# Altium PCB MicroMultimeter__Pcb.PcbDoc
Units mil, origin at the board's own origin, x right, y up, seen from the top; angles counter-clockwise.
Board outline 1380 x 1020 mil, 2 copper layers (Top Layer, Bottom Layer); 56 components, 59 nets, 211 pads, 64 vias.
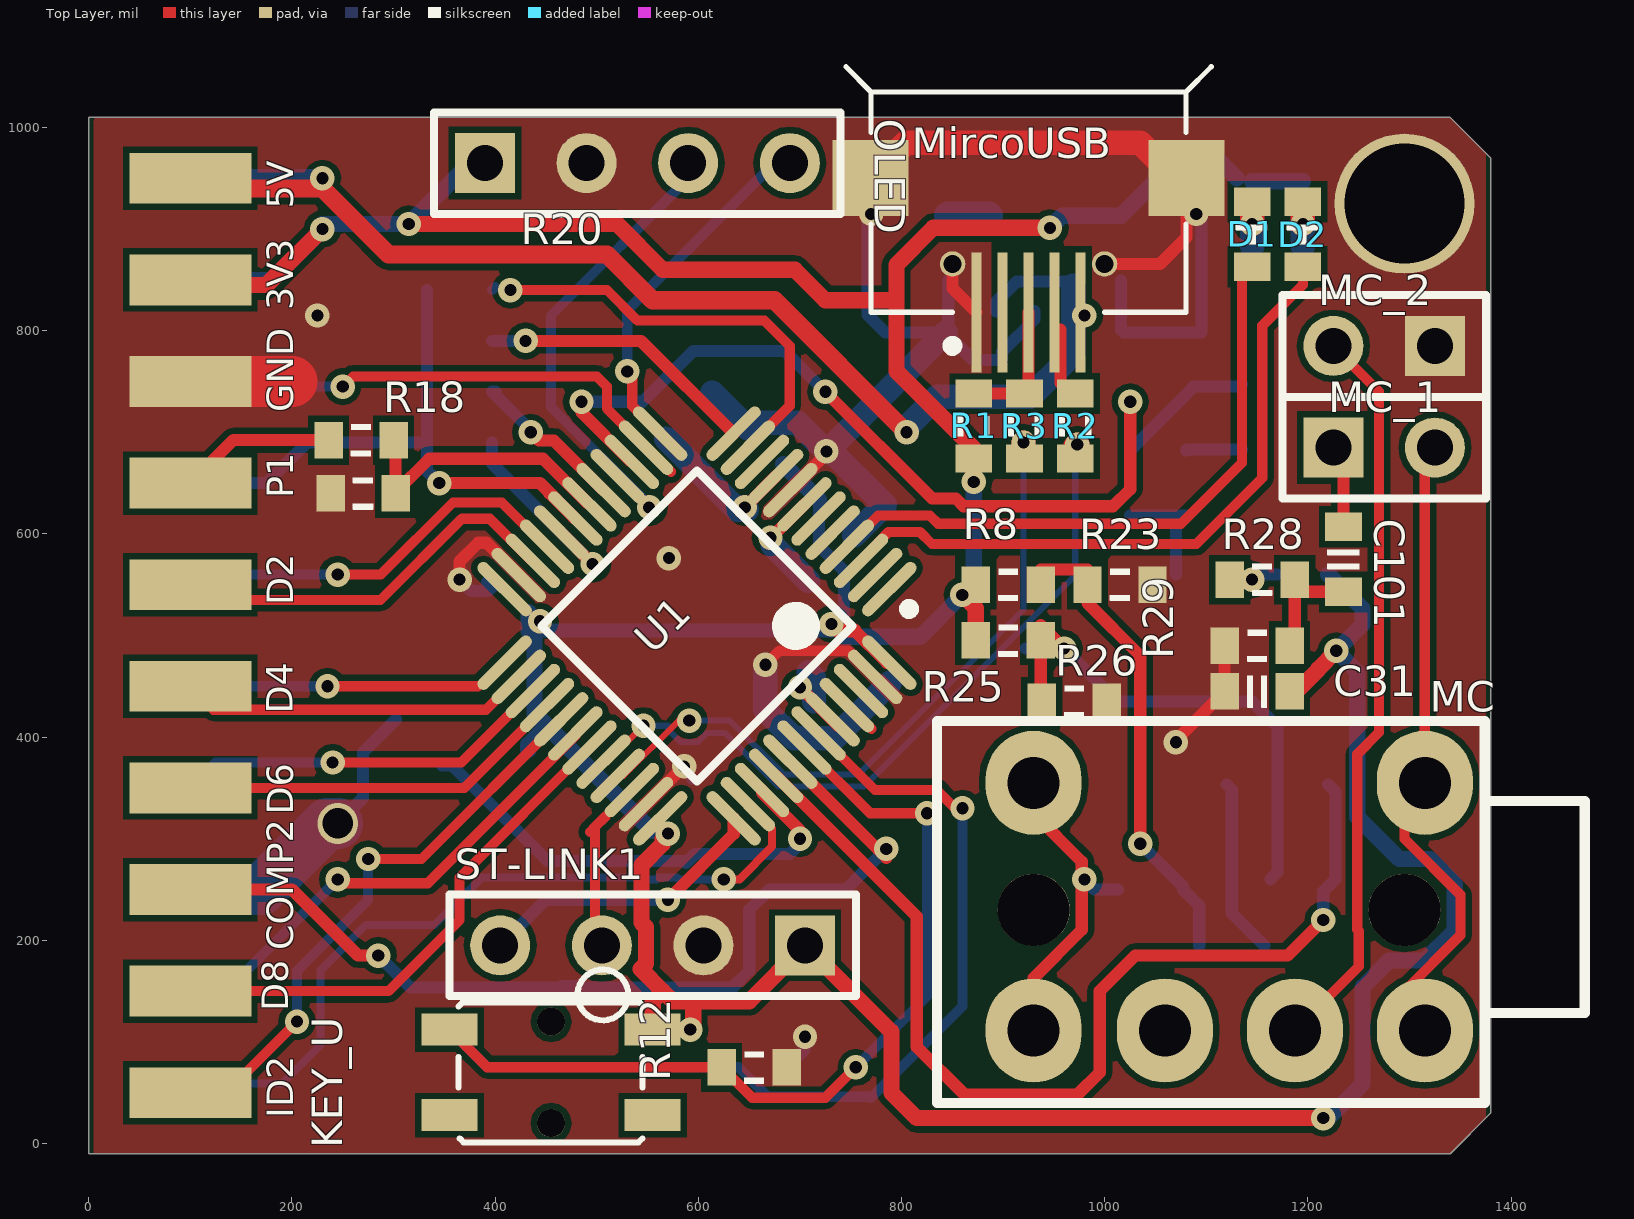
[diagram p0: Top Layer view]
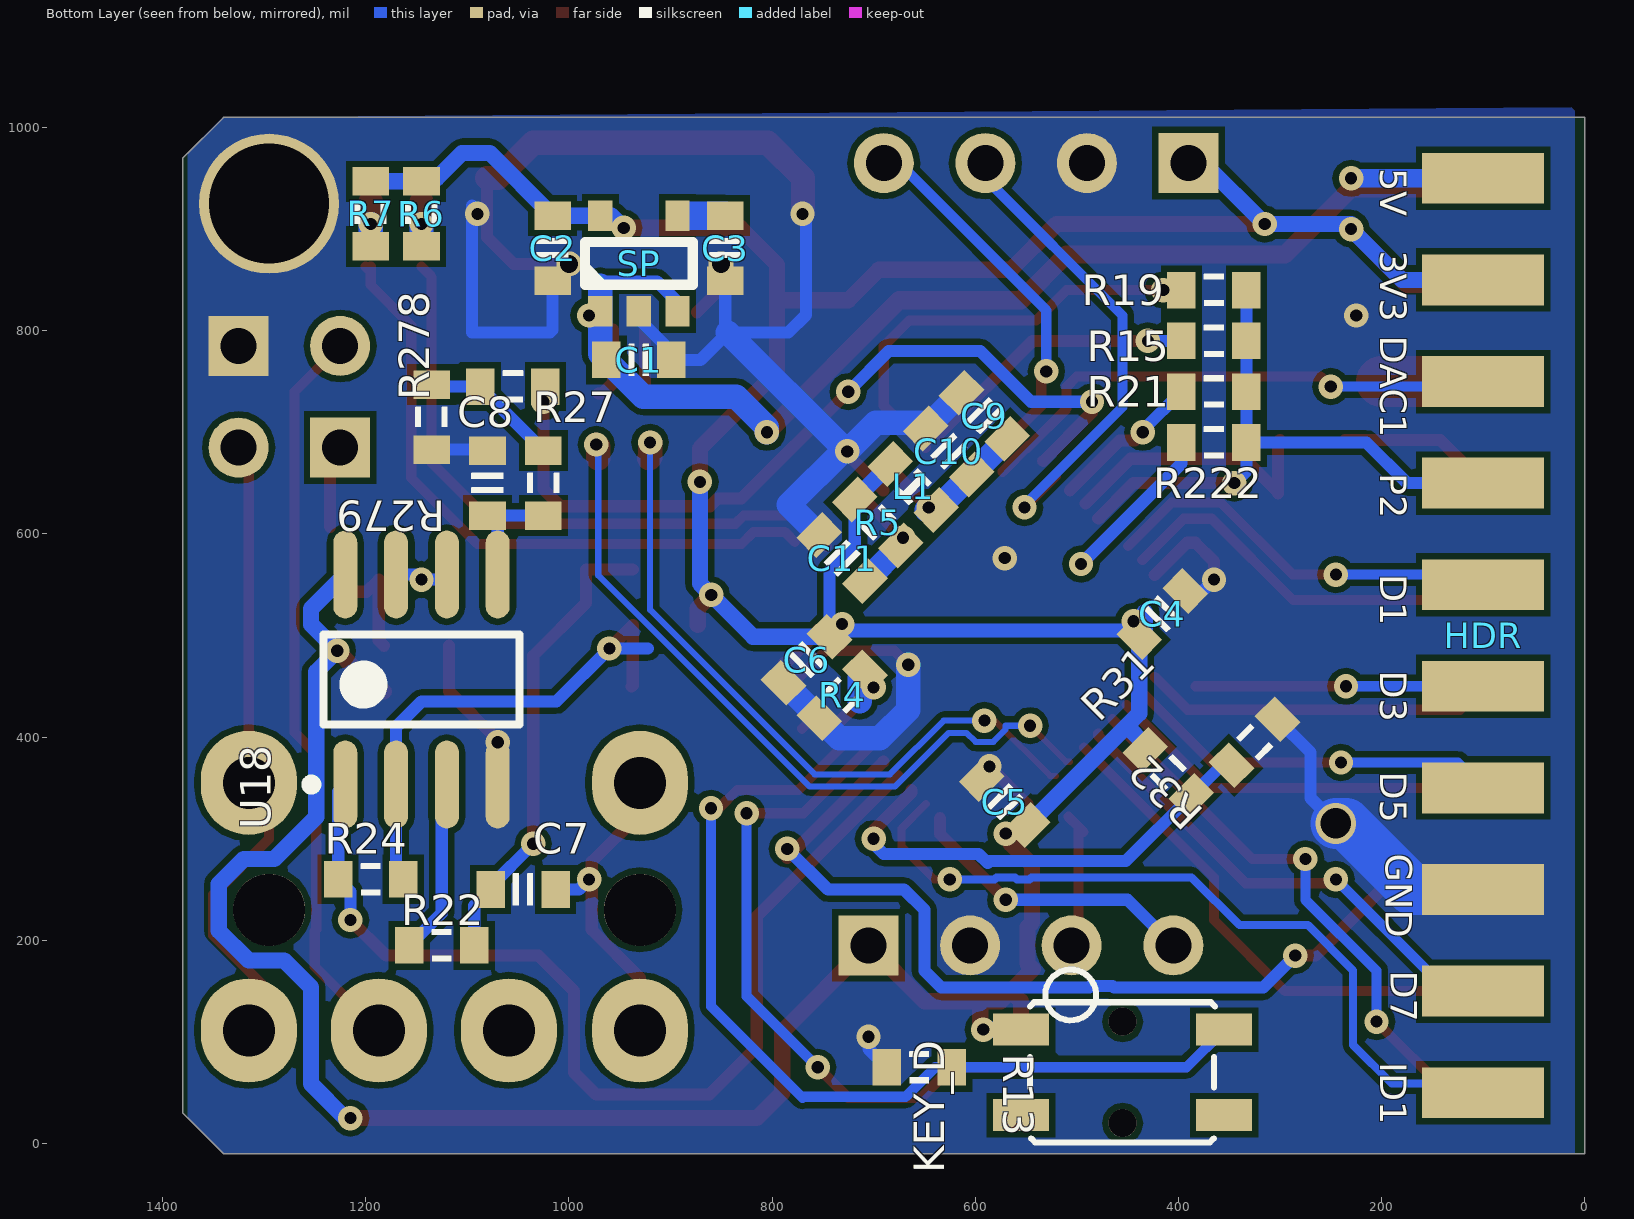
[diagram p1: Bottom Layer view, seen from below]
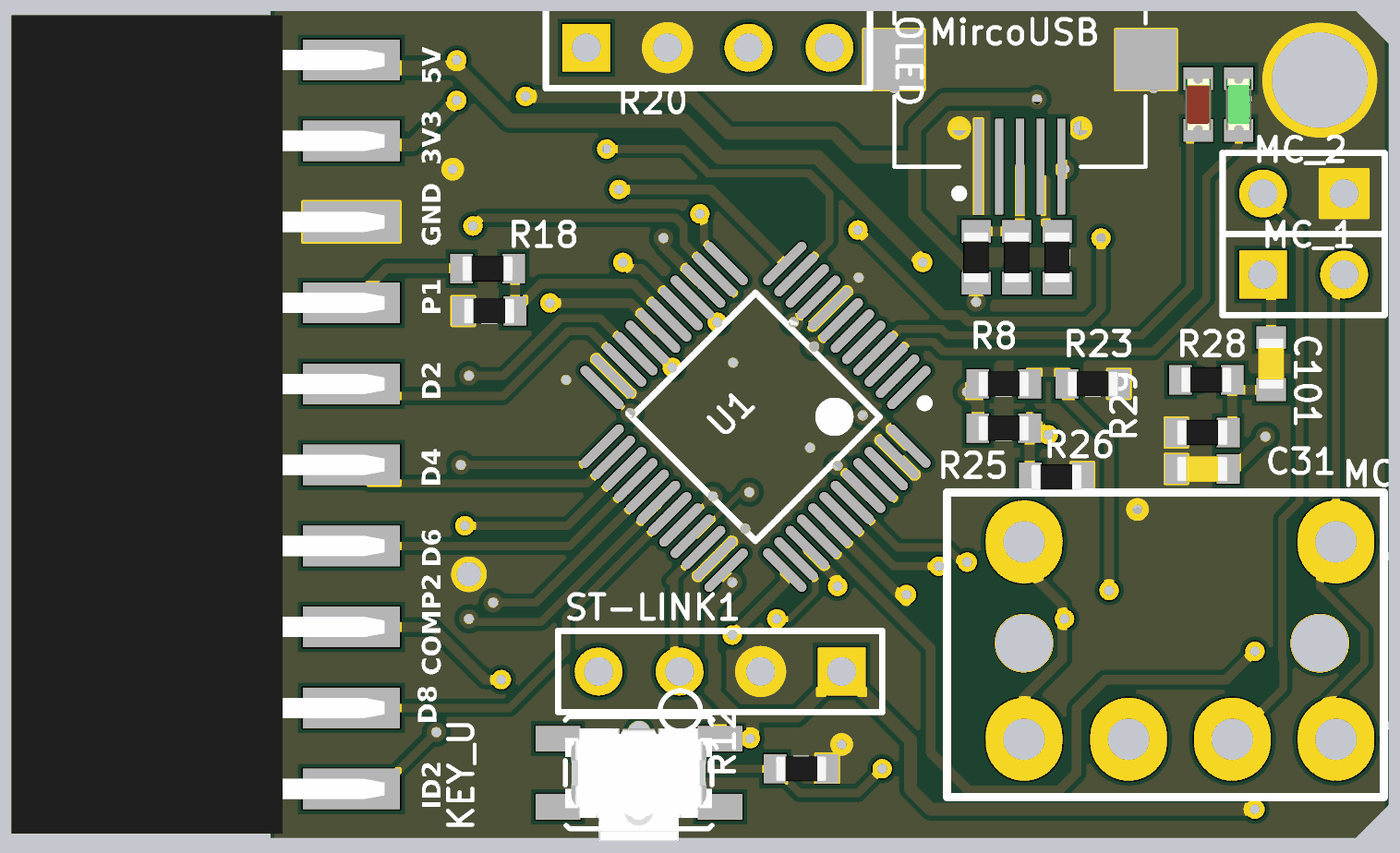
[diagram p2: 3D render of the assembled board from above, using the file's embedded part models]
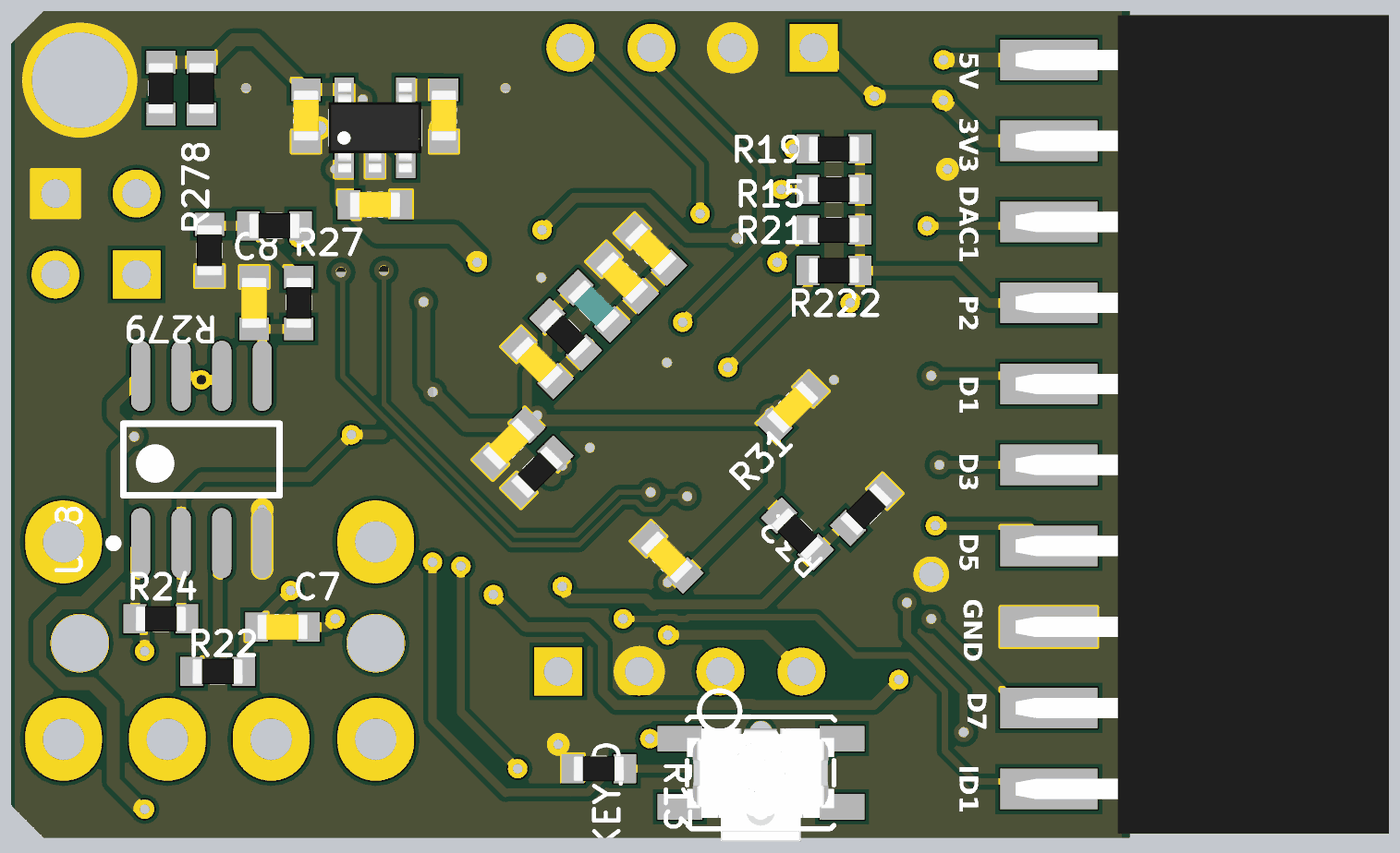
[diagram p3: 3D render of the assembled board from below, using the file's embedded part models]

## Layer stack, top to bottom
Top Layer: signal copper 1.4
Dielectric: dielectric 12.6, FR-4, Dk 4.8
Bottom Layer: signal copper 1.4

## Board outline
0,1010 0,-10 1340,-10 1380,30 1380,970 1340,1010

## Design rules (kind name [scope] priority, off if disabled: settings)
Clearance ClearancePolygon [InPolygon] p1: gap=6
Clearance [All] p2: gap=6
ComponentClearance [All] p1: gap=0 collisioncheckmode=3 verticalgap=0 showdistances=FALSE
Height [All] p1: minheight=0 maxheight=5000 prefheight=500
HoleSize [All] p1: absolutevalues=TRUE maxlimit=200 minlimit=1 maxpercent=80.000 minpercent=20.000
HoleToHoleClearance [All] p1: gap=6 allowstackedmicrovias=TRUE
MinimumSolderMaskSliver [All] p1: minsoldermaskwidth=4
PlaneConnect [All] p1: planeconnectstyle=Direct reliefexpansion=20 reliefentries=4 reliefconductorwidth=20 reliefairgap=10
PolygonConnect [All] p1: connectstyle=Direct reliefconductorwidth=20 reliefentries=4 polygonreliefangle="90 Angle" airgapwidth=10
RoutingVias [All] p1: holewidth=12 width=20 viastyle="Through Hole" minholewidth=12 minwidth=20 maxholewidth=100 maxwidth=200
SilkToSilkClearance [All] p1: silktosilkclearance=0
SilkToSolderMaskClearance SilkscreenOverComponentPads [IsPad] p1: minsilkscreentomaskgap=1 clearancetoexposedcopper=TRUE
SolderMaskExpansion [All] p1: expansion=2
Width [All] p1: maxlimit=64 minlimit=6 preferedwidth=10
20 further rules are at their usual default settings.

## Classes and differential pairs
component class U_MicroMultimeter_OLED_Sch: OLED
component class SWD: ST-LINK1 SWD1
component class MCU: C4 C5 C6 C9 C10 C11 L1 R4 R5 U1
component class LED: D1 D2 R6 R7
component class EXP: HDR HDR1
component class PWR: C1 C2 C3 SP SP1
component class USB: MircoUSB MircoUSB1 R1 R2 R3
component class U_MicroMultimeter_PHONECNT_Sch: C7 C8 C31 C101 MC MC_1 MC_2 R8 R22 R23 R24 R25 R26 R27 R28 R29 R31 R32 R278 R279 U18
component class U_MicroMultimeter__MYPROBE_Sch: R15 R18 R19 R20 R21 R222
component class U_MicroMultimeter_KEY_Sch: KEY_D KEY_U R12 R13

## Components (designator, comment, footprint, x,y, rotation, side; value= is the part's Value field where it differs from the comment)
C1 "Cap_0603" CAP_0603#1 930.98,771.23 r0 bottom
C2 "Cap_0603" CAP_0603#1 1015.98,881.23 r90 bottom
C3 "Cap_0603" CAP_0603#1 845.98,881.23 r90 bottom
C4 "Cap_0603" CAP_0603#1 415.98,521.23 r315 bottom
C5 "Cap_0603" CAP_0603#1 570.98,336.23 r225 bottom
C6 "Cap_0603" CAP_0603#1 765.98,476.23 r135 bottom
C7 "Cap" CAP_0603#2 1045,250 r180 bottom
C8 "Cap" CAP_0603#2 1080,650 r90 bottom
C9 "Cap_0603" CAP_0603#1 590.98,716.23 r225 bottom
C10 "Cap_0603" CAP_0603#1 625.98,681.23 r225 bottom
C11 "Cap_0603" CAP_0603#1 730.98,576.23 r225 bottom
C31 "Cap" CAP_0603#2 1150,445 r180 top
C101 "Cap" CAP_0603#2 1235,575 r270 top
D1 "LED_0603" LED_0603_RED 1145,895 r270 top
D2 "LED_0603" LED_0603_GREEN 1195,895 r270 top
HDR "HDR2x10_2.54" HDR2X10_2.54_180HF 100,950 r180 bottom locked
KEY_D "ButtonTACT" ButtonTACT_3.5*3.55_90 455,70 r0 bottom
KEY_U "ButtonTACT" ButtonTACT_3.5*3.55_90 455,70 r180 top
L1 "Ind_0603" IND_0603 660.98,646.23 r225 bottom
MC "Header 4" microphone 1200,240 r270 top
MC_1 "Header 2" HDR1X2 1225,685 r0 top
MC_2 "Header 2" HDR1X2 1325,785 r180 top
MircoUSB "USB_Micro" Micro_USB 925,1035 r90 top
OLED "Header 4" HDR1X4 390,965 r0 top
R1 "Res_0603" RES_0603 870.98,706.23 r90 top
R2 "Res_0603" RES_0603 970.98,706.23 r270 top
R3 "Res_0603" RES_0603 920.98,706.23 r270 top
R4 "Res_0603" RES_0603 730.98,441.23 r135 bottom
R5 "Res_0603" RES_0603 695.98,611.23 r45 bottom
R6 "Res_0603" RES_0603 1145,915 r90 bottom
R7 "Res_0603" RES_0603 1195,915 r90 bottom
R8 "Res_0603" RES_0603 905,550 r180 top
R12 "Res_0603" RES_0603 655,75 r180 top
R13 "Res_0603" RES_0603 655,75 r180 bottom
R15 "Res_0603" RES_0603 365,790 r180 bottom
R18 "Res_0603" RES_0603 268.07,692.32 r180 top
R19 "Res_0603" RES_0603 365,840 r180 bottom
R20 "Res_0603" RES_0603 270,640 r0 top
R21 "Res_0603" RES_0603 365,740 r180 bottom
R22 "Res_0603" RES_0603 1125,195 r180 bottom
R23 "Res_0603" RES_0603 1015,550 r180 top
R24 "Res_0603" RES_0603 1195,260 r180 bottom
R25 "Res_0603" RES_0603 905,495.25 r180 top
R26 "Res_0603" RES_0603 970,435 r180 top
R27 "Res_0603" RES_0603 1025,650 r90 bottom
R28 "Res_0603" RES_0603 1155,555 r0 top
R29 "Res_0603" RES_0603 1150,490 r180 top
R31 "Res_0603" RES_0603 410,365 r45 bottom
R32 "Res_0603" RES_0603 325,395 r315 bottom
R222 "Res_0603" RES_0603 365,690 r180 bottom
R278 "Res_0603" RES_0603 1055,745 r0 bottom
R279 "Res_0603" RES_0603 1135,715 r270 bottom
SP "SP6205" SOT23-5 930.98,866.23 r90 bottom
ST-LINK1 "Header 4" HDR1X4 705,195 r180 top
U1 "STM32L151C8T6" LQFP48_N 785.98,541.23 r225 top
U18 "LM258" SOP-8 1070,560 r90 bottom

## Footprints (in the part's own frame and the unit in brackets; to place one, negate y for a bottom-side part, rotate by r counter-clockwise, add the part's x,y. Pads: shape width x height; smd on the part's side, far side on the other; paste and mask are expansions set on the pad)
ButtonTACT_3.5*3.55_90 [mm]
  round 0.7 hole 0.7 mask+0: 0(0,-1.27) 0(0,1.27)
  rect 1.4x0.8 smd: 1(-2.54,1.069) 2(2.54,1.069) 3(-2.54,-1.069) 4(2.54,-1.069)
  silkscreen extent -2.31,-1.75 2.31,1.75, body extent -2.29,-1.39 2.31,2.16, height 1.42
CAP_0603#1 [mil] "Chip Resistor; Body 2.0 x 1.3 mm (LxW typ)"
  rect 28x36 smd: 1(-32,0) 2(32,0)
  silkscreen extent -10,-16 10,16, body extent -31,-16 31,16, height 36
CAP_0603#2 [mil]
  rect 28x36 smd: 1(32,0) 2(-32,0)
  silkscreen extent -10,-16 10,16, body extent -31,-16 31,16, height 36
HDR1X2 [mm] "Connector; Header; 2 Position"
  rect 1.5x1.5 hole 0.9: 1(0,0)
  round 1.5 hole 0.9: 2(2.54,0)
  silkscreen extent -1.27,-1.27 3.81,1.27
HDR1X4 [mm] "Connector; Header; 4 Position"
  rect 1.5x1.5 hole 0.9: 1(0,0)
  round 1.5 hole 0.9: 2(2.54,0) 3(5.08,0) 4(7.62,0)
  silkscreen extent -1.27,-1.27 8.89,1.27
HDR2X10_2.54_180HF [mil]
  rect 120x50 smd: 1(0,0) 3(0,-100) 5(0,-200) 7(0,-300) 9(0,-400) 11(0,-500) 13(0,-600) 15(0,-700) 17(0,-800) 19(0,-900)
  rect 120x50 smd far side: 2(0,0) 4(0,-100) 6(0,-200) 8(0,-300) 10(0,-400) 12(0,-500) 14(0,-600) 16(0,-700) 18(0,-800) 20(0,-900)
  body extent -41,-955 420,55, height 88
IND_0603 [mil]
  rect 28x36 smd: 1(-32,0) 2(32,0)
  silkscreen extent -10,-15 10,15, body extent -31,-16 31,16, height 37
LED_0603_GREEN [mil]
  rect 28x36 smd: 1(-32,0) 2(32,0)
  silkscreen extent -10,-16 10,16, body extent -32,-16 32,16, height 24
LED_0603_RED [mil]
  rect 28x36 smd: 1(-32,0) 2(32,0)
  silkscreen extent -10,-16 10,16, body extent -32,-16 32,16, height 24
LQFP48_N [mm]
  oval 1.8x0.3 smd: 1(-0.113,-0.044) 2(-0.113,-0.544) 3(-0.113,-1.044) 4(-0.113,-1.544) 5(-0.113,-2.044) 6(-0.113,-2.544) 7(-0.113,-3.044) 8(-0.113,-3.544) 9(-0.113,-4.044) 10(-0.113,-4.544) 11(-0.113,-5.044) 12(-0.113,-5.544) 25(7.987,-5.544) 26(7.987,-5.044) 27(7.987,-4.544) 28(7.987,-4.044) 29(7.987,-3.544) 30(7.987,-3.044) 31(7.987,-2.544) 32(7.987,-2.044) 33(7.987,-1.544) 34(7.987,-1.044) 35(7.987,-0.544) 36(7.987,-0.044)
  oval 0.3x1.8 smd: 13(1.187,-6.844) 14(1.687,-6.844) 15(2.187,-6.844) 16(2.687,-6.844) 17(3.187,-6.844) 18(3.687,-6.844) 19(4.187,-6.844) 20(4.687,-6.844) 21(5.187,-6.844) 22(5.687,-6.844) 23(6.187,-6.844) 24(6.687,-6.844) 37(6.687,1.256) 38(6.187,1.256) 39(5.687,1.256) 40(5.187,1.256) 41(4.687,1.256) 42(4.187,1.256) 43(3.687,1.256) 44(3.187,1.256) 45(2.687,1.256) 46(2.187,1.256) 47(1.687,1.256) 48(1.187,1.256)
  silkscreen extent -0.24,-5.54 6.69,0.78
Micro_USB [mm]
  rect 3x0.25 smd: 1(-5.508,-1.3) 2(-5.508,-0.65) 3(-5.508,0) 4(-5.508,0.65) 5(-5.508,1.3)
  round 0.635 hole 0.457: 5(-4.3,-1.9) 5(-4.3,1.9)
  rect 1.9x1.9 smd: 5(-2.15,3.95) 5(-2.15,-3.95)
  silkscreen extent -6.47,-4.57 0.63,4.57
microphone [mm]
  oval 2.6x2.4 hole 1.3: 1(-2.921,2.921) 1(3.268,2.921) 2(3.268,-0.329) 3(3.268,-3.579) 4(-2.921,-6.858) 4(3.268,-6.858)
  round 1.8 hole 1.8: ""(0.254,2.413) ""(0.254,-6.858)
  silkscreen extent -4.47,-9.27 5.08,6.92
RES_0603 [mil]
  rect 28x36 smd: 1(-32,0) 2(32,0)
  silkscreen extent -10,-16 10,16, body extent -31,-16 32,16, height 20
SOP-8 [mm] "SOP, 8-Leads, Body 4.9x3.9mm (max), Pitch 1.27mm, IPC Medium Density"
  oval 2.2x0.6 smd: 1(-5.25,3.81) 2(-5.25,2.54) 3(-5.25,1.27) 4(-5.25,0) 5(0,0) 6(0,1.27) 7(0,2.54) 8(0,3.81)
  silkscreen extent -5.37,-0.55 -1.5,4.79, body extent -4.58,-0.55 -0.68,4.36, height 1.75
SOT23-5 [mil]
  rect 30x24 smd: 1(-47,38) 2(-47,0) 3(-47,-38) 4(47,-38) 5(47,38)
  silkscreen extent -21,-53 21,53, body extent -55,-57 55,57, height 57

## Part data
C1 C2 C3 C4 C5 C6 C7 C8 C9 C10 C11 C31 C101: "Capacitor"
D1 D2: "LED"
HDR: "Header"
KEY_D KEY_U: "Button"
L1: "Inductor"
MC OLED ST-LINK1: "Header, 4-Pin"
MC_1 MC_2: "Header, 2-Pin"
MircoUSB: "USB"
R1 R2 R3 R4 R5 R6 R7 R8 R12 R13 R15 R18 R19 R20 R21 R22 R23 R24 R25 R26 R27 R28 R29 R31 R32 R222 R278 R279: "Resistor"
SP: "Power"
U1: "STM32 ARM-based 32-bit MCU with 64 Kbytes Flash, 48-pin LQFP, Industrial Temperature"
U18: "Amplifier"

## Free pads (board coordinates)
  round 137.79 hole 118.11: 0(1295,925)

## Via types
v1: diameter 24, hole 12, Top Layer to Bottom Layer, 63 vias
v2: diameter 40, hole 30, Top Layer to Bottom Layer, 1 vias

## Nets (pads, with @x,y where several pads share a name; then routed paths per layer and width w, separated by ;. In a path a pad name is that pad's centre, name@x,y a point inside that pad or via, vN(x,y) a via of type N, cw(c..) or ccw(c..) an arc to the next point about the centre after c; other vN are vias at no path point)
1V: R24.2 R25.1 R26.2 U18.2 | length 525.8
  Top Layer w12: R26.2@938,450 937,451 937,510.25 v1(960,487.25)
  Bottom Layer w12: 922.25,487.25 v1(960,487.25) 1012.25,435 1145,435 1170,410 U18.2 1170,267 R24.2
3V3: C2.2 C4.2 C5.2 C6.2 C31.2 HDR.3 HDR.4 KEY_D.4 KEY_U.3 L1.1 OLED.1 R1.1 R5.2 R6.2 R7.2 R8.2 R25.2 R31.2 SP.5 ST-LINK1.1 U1.24 U1.36 U1.48 U18.8 | length 4647.7
  Top Layer w12: 753.61,505 785.38,473.22 U1.48
  Top Layer w14: v1@737.21,505 753.61,505
  Top Layer w16: HDR.4 105,845 175,845 v1(230,900) ; v1(315,905) 520,905 565,860 695,860 725,830 795,830 ; KEY_U.3 555,140 565,150 ; v1(570,305) 565,300 565,295 544,274 544,217.56 548.53,213.03 548.53,176.97 543.28,171.72 565,150 ; v1(592.09,112.09) 595,115 595,140 ; v1(859.75,540) 873,526.75 R25.2@873,510.25 ; v1(870.98,651.23) R1.1 870.98,684.02 795,760 795,865 831.23,901.23 v1(945.98,901.23) ; C31.2 1188.8,445 1210,466.2 1210,466.91 v1@1227.96,484.87 ; v1(1215,25) 815,25 790,50 790,110 ST-LINK1.1 650,140 595,140 ; 565,150 575,140 595,140
  Bottom Layer w12: R5.2 718.61,588.61 743.35,563.86 C6.2@743.35,505
  Bottom Layer w14: C4.2@438.61,505 C6.2@743.35,505
  Bottom Layer w16: HDR.3 180,850 v1(230,900) ; v1@227.5,902.5 230,905 v1(315,905) OLED.1@375,965 ; R31.2 432.63,392.63 450.98,410.98 ; C4.2@433.04,504.17 433.04,522.81 ; C4.2@438.61,505 C4.2 438.61,423.35 450.98,410.98 ; C5.2@554.32,307.64 450.98,410.98 ; KEY_D.4 v1(592.09,112.09) ; L1.1 R5.2 ; C6.2 818.61,498.86 v1(859.75,540) 870.98,551.23 v1(870.98,651.23) ; v1(945.98,901.23) 957.98,913.23 SP.5 C2.2 1077.75,975 1105,975 R6.2@1130,950 ; R6.2 R7.2 ; v1(1215,25) 1220,25 1253.76,58.76 1253.76,153.76 1280.09,180.09 1315,180.09 1344.43,209.52 1344.43,255.39 1319.82,280 1290,280 1248.57,321.43 1248.57,464.27 v1(1227.84,485) 1253.76,510.92 1253.76,526.24 U18.8
  other v1: 730.98,511.23 444.1,513.98
5V: C1.2 HDR.1 HDR.2 MircoUSB.1 SP.1 SP.3 | length 1292.9
  Top Layer w18: HDR.2 110,940 230,940 295,875 510,875 555,830 675,830 v1(805,700)
  Bottom Layer w12: SP.3 892.98,828.23 913.3,848.56 964.05,848.56 ; SP.1 SP.1@968.98,823.23
  Bottom Layer w18: HDR.1 v1(230,950)
  Bottom Layer w24: v1(805,700) 805,705 835,735 926.75,735 C1.2 968.98,777.23 SP.1 ; SP.1@968.98,823.23 968.98,844.23
  other v1: 980,815
BOOT0: R4.2 U1.44 | length 85.2
  Top Layer w12: v1(700,448.97) U1.44@738.53,410.44
  Bottom Layer w24: R4.2 713.82,458.39 713.82,435.44
COMP1_INP: U1.10
COMP_INM: R31.1 R32.2 U1.39 | length 468.6
  Top Layer w12: U1.39 662.63,345.43 700,308.06 v1(700,300)
  Bottom Layer w12: R32.2 357.37,372.37 R31.1 451.75,278 585.74,278 587.74,276 596.74,285 690,285 700,295 v1(700,300)
COMP_INP: R24.1 U1.40 U18.1 | length 1002.8
  Top Layer w12: U1.40 815,223.41 815,95 861.84,48.16 973.16,48.16 995,70 995,150 1030,185 1180,185 v1(1215,220)
  Bottom Layer w12: v1(1215,220) 1215,248 R24.1 1227,346.31 U18.1
DAC_OUT: HDR.5 U1.14 | length 532.9
  Top Layer w10: v1(250,745) 260,755 500,755 510,745 510,723.29 U1.14 ; U1.14@547.23,687.01 U1.14@573.01,661.23
  Bottom Layer w10: HDR.5 105,745 v1(250,745)
EXP_01: HDR.9 U1.21 | length 400.8
  Top Layer w10: v1(245,560) 287.53,560 358.53,631 406.62,631 U1.21@449.51,588.11
  Bottom Layer w10: HDR.9 110,560 v1(245,560)
EXP_02: HDR.10 U1.22 | length 391.8
  Top Layer w10: HDR.10 115,535 287.21,535 367.21,615 394.78,615 U1.22@435.59,574.19
EXP_03: HDR.11 U1.25 | length 282.9
  Top Layer w10: v1(235,450) 382.93,450
  Bottom Layer w10: HDR.11 v1(235,450)
EXP_04: HDR.12 U1.26 | length 346.1
  Top Layer w10: HDR.12 123,427 390.91,427 U1.26
EXP_05: HDR.13 U1.27 | length 376.6
  Top Layer w10: v1(240,375) 366.75,375 U1.27
  Bottom Layer w10: HDR.13 125,375 v1(240,375)
EXP_06: HDR.14 U1.28 | length 406.9
  Top Layer w10: HDR.14@80,355 85,350 369.59,350 U1.28
EXP_07: HDR.17 U1.30 | length 488.4
  Top Layer w10: v1(245,260) 248.77,256.23 333.76,256.23 478.89,401.36 U1.30
  Bottom Layer w10: HDR.17 135,150 v1(245,260)
EXP_08: HDR.18 U1.31 | length 516.6
  Top Layer w10: HDR.18 295,150 365,220 365,261.9 U1.31
EXP_COMP_INP: HDR.16 U1.41 | length 960.4
  Top Layer w12: HDR.16 200,250 265,185 v1(285,185) ; U1.41 785,281.25 v1(785,290)
  Bottom Layer w12: v1(285,185) 316.53,153.47 463.47,153.47 465,155 486.27,155 487.8,153.47 633.47,153.47 650,170 650,230 670,250 745,250 v1(785,290)
EXP_ID1: HDR.19 U1.38 | length 799.2
  Top Layer w8: v1(625,260) 640.34,260 672.57,292.23 672.57,310.16 U1.38
  Bottom Layer w8: HDR.19@120,30 HDR.19 109,59 190,59 228,97 228,170.37 272.63,215 340,215 387,262 544.53,262 546.53,260 558.89,260 560.89,262 579.11,262 581.11,260 v1(625,260)
EXP_ID2: HDR.20 U1.29 | length 569.9
  Top Layer w10: HDR.20 135,50 v1(205,120) ; v1(275,280) 327.42,280 U1.29
  Bottom Layer w10: v1(205,120) 205,170 275,240 v1(275,280)
GND: C1.1 C2.1 C3.1 C4.1 C5.1 C6.1 C8.1 C9.1 C10.1 C11.1 C31.1 HDR.6 HDR.15 MC_2.1 MircoUSB.5 OLED.2 pad.0 R4.1 R12.1 R13.1 R20.1 R23.1 R26.1 R29.2 R32.1 R279.2 SP.2 ST-LINK1.2 U1.8 U1.23 U1.35 U1.47 U18.4 | length 2817.4
  Top Layer w10: v1(665.98,471.23) 679.75,485 747.38,485 778.72,453.66 U1.47@780.58,453.66
  Top Layer w12: v1(365,555) 365,572.89 383.34,591.23 391.5,591.23 U1.23 ; U1.35 548.77,334.03 v1(585.98,371.23) ; U1.8 725.98,678.56 v1(725.98,681.23) ; MircoUSB.5@850.2,865.71 850.2,841.77 MircoUSB.5@873.82,818.15 ; MircoUSB.5@999.8,865.71 1054.29,865.71 1080.51,891.93 MircoUSB.5@1080.51,950.35 ; v1(1070,395) 1070,397 C31.1 R29.2
  Top Layer w24: MircoUSB.5@769.49,915.51 769.49,950.35 804.13,985 1035,985 1069.65,950.35 MircoUSB.5@1080.51,950.35
  Top Layer w50: HDR.6 200,750
  Bottom Layer w12: v2(245,315) 270,340 270,385 302.37,417.37 R32.1 ; v1(365,555) 376.14,543.86 C4.1 ; C4.1@391.96,552.47 C4.1@396.96,547.47 ; R13.1 705,93 v1(705,105) ; v1(770,915) 766.61,911.61 766.61,815.6 783.98,798.23 843.38,798.23 870.38,771.23 C1.1 898.98,779.23 930.98,811.23 SP.2 ; C6.1 C6.1@796.23,461.23 ; 845.98,800.83 C3.1 ; 1015.98,800.83 C2.1 ; 1018.58,798.23 1095.35,798.23 v1@1095.35,923.23 ; C8.1 1081,683 R279.2
  Bottom Layer w24: C9.1 C10.1 648.61,709.49 697.73,709.49 v1(725.98,681.23) 726.38,681.23 v1@728.55,683.4 ; v1(665.98,471.23) 665.98,426.75 693.87,398.86 733.86,398.86 C6.1 ; v1@728.35,683.61 v1@728.55,683.4 ; C11.1 783.35,628.61 v1@728.55,683.4 ; 843.38,798.23 v1@728.55,683.4
  Bottom Layer w50: HDR.15 170,250 235,315 v2(245,315)
  other v1: 570.98,576.23 225,815 1090,915
KEY_D: KEY_D.3 R13.2 U1.43 | length 937.3
  Top Layer w10: U1.43 773.93,348 834.53,348 852.53,330 v1(860,330)
  Bottom Layer w10: KEY_D.3 392.09,75 R13.2 639.44,75 668.44,46 769,46 770,45 860,135 v1(860,330)
KEY_U: KEY_U.4 R12.2 U1.42 | length 866.6
  Top Layer w10: KEY_U.4 392.09,75 R12.2 653,45 725,45 v1(755,75) ; U1.42 769.09,325 v1(825,325)
  Bottom Layer w10: v1(755,75) 825,145 v1(825,325)
LED_B: U1.2
LED_G: D2.2 U1.3 | length 645.4
  Top Layer w10: U1.3@777.32,591.93 787.39,602 818,602 830,590 1090,590 1155,655 1155,805 1195,845 D2.2@1195,858 ; D2.2 D2.2@1195,858 ; D2.2@1200,863 D2.2@1195,858
LED_R: D1.2 U1.4 | length 626.9
  Top Layer w10: U1.4 776.78,618 828,618 836.03,609.97 1074.97,609.97 1135,670 1135,853 D1.2
NetC3_2: C3.2 SP.4 | length 40
  Bottom Layer w28: C3.2 SP.4@885.98,913.23
NetC7_2: C7.2 R8.1 R22.2 R23.2 | length 461.6
  Top Layer w12: R8.1@937,565 983,565 983,532 1035,480 v1(1035,295)
  Bottom Layer w12: v1(1035,295) 1077,253 C7.2 1093,234 R22.2
NetC8_2: C8.2 R27.1 U18.5 | length 117.1
  Bottom Layer w12: R27.1 C8.2 1070,608 U18.5
NetC101_1: C101.1 R28.2 R29.1 | length 120
  Top Layer w12: R29.1 1187,495 R28.2 1199,543 C101.1
NetD1_1: D1.1 R6.1 | length 44
  Top Layer w24: v1(1145,905) D1.1
  Bottom Layer w24: R6.1 v1(1145,905)
NetD2_1: D2.1 R7.1 | length 44
  Top Layer w24: v1(1195,905) D2.1
  Bottom Layer w24: R7.1 v1(1195,905)
NetMC_1: MC.1 MC_1.2 | length 691.7
  Top Layer w10: MC.1@1295,101.34 1295,150 1350,205 1350,245 1295,300 1295,385 MC.1@1315,405 ; MC.1@1315,355 MC.1@1315,405 ; MC_1.2 1315,675 MC.1@1315,405
NetMC_2: MC.2 MC_2.2 | length 727.8
  Top Layer w10: MC.2 1250,174.29 1250,209.33 1248.57,210.77 1248.57,383.29 1270,404.72 1270,740 MC_2.2
NetMircoUSB_2: MircoUSB.2 R2.1 | length 71.4
  Top Layer w12: 956.57,801.23 956.57,748.43 966.77,738.23 R2.1
NetMircoUSB_3: MircoUSB.3 R1.2 R3.1 | length 131.6
  Top Layer w12: R1.2 R3.1 925,742.25 MircoUSB.3
NetMircoUSB_4: MircoUSB.4
NetR22_1: R22.1 U18.3 | length 173.6
  Bottom Layer w12: U18.3 1125,348.31 1125,227 R22.1
NetR27_2: R27.2 R278.2 R279.1 | length 137.5
  Bottom Layer w12: R27.2 1087,744 R278.2 1133,745 R279.1
NetR28_1: R28.1 U18.6 U18.7 | length 76.1
  Top Layer w12: R28.1 v1(1145,555)
  Bottom Layer w12: U18.6 1125,555 v1(1145,555) 1150,560 U18.7
NetU1_45: U1.45 | length 25
  Top Layer w10: U1.45@752.74,425.82 U1.45@770.4,408.16
NetU1_46: U1.46
OLED_SCL: OLED.4 U1.13 | length 361
  Top Layer w10: v1(530,760) 535,755 535,726.12 U1.13
  Bottom Layer w10: v1(530,760) 530,820 660,950 OLED.4@690,980
OLED_SDA: OLED.3 U1.16 | length 463.5
  Top Layer w10: U1.16 v1(551.51,626.09)
  Bottom Layer w10: v1(551.51,626.09) 551.51,628.49 455,725 455,815 OLED.3@590,950
PROBE_CH1: HDR.8 R18.2 | length 153.6
  Top Layer w12: HDR.8 142.32,692.32 R18.2
PROBE_CH2: HDR.7 R15.2 R19.2 R21.2 R222.2 U1.19 | length 627
  Top Layer w12: v1(345,650) 444.09,650 U1.19 ; 453.23,640.07 U1.19@477.35,615.95
  Bottom Layer w12: HDR.7 175,650 215,690 R222.2 ; R19.2 R15.2 R21.2 R222.2 ; v1(345,650) 333,662 R222.2
PROBE_I0: R18.1 R20.2 U1.18 | length 274.4
  Top Layer w12: R18.1 302,690.39 R20.2@302,640.94 ; R20.2 R20.2@302,640.94 ; U1.18@491.27,629.87 447.13,674 335.06,674 R20.2@302,640.94
PROBE_S1: R19.1 U1.11 | length 419.3
  Top Layer w10: v1(415,840) 510,840 540,810 665,810 690,785 690,726.09 U1.11
  Bottom Layer w10: R19.1 R19.1@400,843
PROBE_S2: R15.1 U1.12 | length 275.6
  Top Layer w12: v1(430,790) 543.5,790 U1.12
  Bottom Layer w12: R15.1 v1(430,790)
PROBE_S3: R21.1 U1.17 | length 154.1
  Top Layer w12: v1(435,700) 443,692 457.77,692 U1.17
  Bottom Layer w12: R21.1@400,740 R21.1 435,702 v1(435,700)
PROBE_S4: R222.1 U1.20 | length 204.2
  Top Layer w12: U1.20 v1(495.83,570.42)
  Bottom Layer w12: R222.1 397,669.25 v1(495.83,570.42)
RST: C11.2 R5.1 U1.7 | length 96.5
  Top Layer w12: v1(670.98,596.23) 671.5,596.23 U1.7
  Bottom Layer w24: R5.1 C11.2
SOUND_IN_L: C7.1 MC.4 | length 320.1
  Top Layer w12: MC.4@930,111.34 930,162.92 977.43,210.35 977.43,277.43 930,324.87 MC.4@930,355
  Bottom Layer w12: v1(980,260) 990,250 C7.1
SOUND_OUT: R278.1 U1.15 | length 795.2
  Top Layer w12: v1(485,730) 485,719.65 U1.15@533.02,671.62 ; v1(725,740) 830,635 853.27,635 861.04,627.23 1008.19,627.23 1025,644.04 v1(1025,730)
  Bottom Layer w12: v1(485,730) 545,730 595,780 685,780 v1(725,740)
SW_CLK: ST-LINK1.4 U1.37 | length 290.6
  Top Layer w12: v1(570,240) 634.79,304.79 U1.37
  Bottom Layer w12: ST-LINK1.4 450,240 v1(570,240)
SW_DIO: ST-LINK1.3 U1.34 | length 140.7
  Top Layer w10: 493.31,306.69 498.31,311.69 ; ST-LINK1.3 498.31,201.69 498.31,311.69 ; 508.31,321.69 498.31,311.69
TO_PHONE: C101.2 MC_1.1 | length 82.1
  Top Layer w12: MC_1.1 1235,675 C101.2
USB_DM: R2.2 U1.32 | length 743.7
  Top Layer w6: U1.32 510.53,375.79 v1(545.98,411.23)
  Top Layer w24: R2.2 970.98,685.98 v1(972.99,687.99)
  Bottom Layer w6: v1(545.98,411.23) 569.98,411.23 569.98,407.54 582.28,395.23 599.68,395.23 608.68,404.23 626.01,404.23 679.01,351.23 762.95,351.23 970.98,559.26 970.98,685.98 v1(972.99,687.99)
USB_DP: R3.2 U1.33 | length 691.9
  Top Layer w6: U1.33 526.31,361.87 580.68,416.23 v1(590.98,416.23)
  Top Layer w24: v1(920,690) 920,675.21 R3.2
  Bottom Layer w6: v1(590.98,416.23) 630.98,416.23 683.98,363.23 757.98,363.23 920,525.25 v1(920,690)
VDDA: C9.2 C10.2 L1.2 U1.9 | length 155
  Top Layer w12: v1(645.68,626.09) U1.9
  Bottom Layer w24: C9.2 L1.2 L1.2@647.29,623.61 ; v1(645.68,626.09) 647.29,624.48 L1.2@647.29,623.61 ; L1.2@647.58,623.61 L1.2@647.29,623.61
pads on no net: KEY_D.0 KEY_D.1 KEY_D.2 KEY_U.0 KEY_U.1 KEY_U.2 MC. MC.3 U1.1 U1.5 U1.6

## Polygon pours and split planes (outlines as drawn)
GND on Top Layer "Keep-Out Layer-No Net" (solid, remove dead copper, pour order 9): 0,1010 5,1005 5,-10 1340,-10 1375,25 1375,975 1340,1010
GND on Bottom Layer "Keep-Out Layer-No Net" (solid, remove dead copper, pour order 11): 10,1020 10,-10 5,-15 10,-10 1340,-10 1375,25 1375,975 1340,1010

## Silkscreen, mask and mechanical layers (free items; w line width, h text height)
Top Overlay:
  circle w6: c505.98,146.23 r25
  text "5V" at 210,920 h45 r90
  text "3V3" at 210,820 h45 r90
  text "GND" at 210,720 h45 r90
  text "P1" at 210,635 h45 r90
  text "D2" at 210,530 h45 r90
  text "D4" at 209.65,422.88 h45 r90
  text "D6" at 209.91,323.6 h45 r90
  text "COMP2" at 210,190 h45 r90
  text "D8" at 205,130 h45 r90
  text "ID2" at 210,25 h45 r90
Bottom Overlay:
  circle w6: c505.98,146.23 r25
  text "5V" at 210,960 h45 r90
  text "3V3" at 210.35,878.89 h45 r90
  text "DAC1" at 210,795 h45 r90
  text "P2" at 210.35,659.74 h45 r90
  text "D1" at 210,560.29 h45 r90
  text "D3" at 210.35,465.22 h45 r90
  text "D5" at 210,365.99 h45 r90
  text "GND" at 205,285 h45 r90
  text "D7" at 200,170 h45 r90
  text "ID1" at 210,80 h45 r90
Mechanical 1:
  lines w2: 0,-10 0,1010 1340,1010 1350,1000 1380,970 1380,30 1340,-10 0,-10